# EAGLE board smartwatch (1)9 (EAGLE 6.3)

Size 100 x 80 mm. Coordinates in mm from the lower left corner, seen from the top.
Outline: 0,0 100,0 100,80 0,80 0,0
Copper layers (1*16): Top 0.035mm / dielectric 1.5mm / Bottom 0.035mm
Design rules "default": minimum track width 10mil, minimum drill 24mil, track to track 8mil, track to pad 8mil, pad to pad 8mil, via to via 8mil, smd to smd 8mil, copper to edge 40mil, drill to drill 8mil, minimum pad ring 10mil, minimum via ring 8mil, stop-mask expansion 4mil, vias tented up to drill 0mil, thermal gap 10mil

## Footprints (pad centres in the part's own frame; a part is rotated, then mirrored left to right if it is on the bottom)
C0805 = smd 1.3 x 1.5: 1 -0.95,0; 2 0.95,0
1X02 = drill 1.016 long: 1 -1.27,0; 2 1.27,0
USB-B-MICRO-SMD_V03 = smd 1.4 x 0.4: D+1 2.7,0; D-1 2.7,0.65; GND1 2.7,-1.3; ID1 2.7,-0.65; VBUS1 2.7,1.3 | hole 0.85: 2.2,1.9; 2.2,-1.9
2X03 = drill 1.016 octagon: 1 -2.54,-1.27; 2 -2.54,1.27; 3 0,-1.27; 4 0,1.27; 5 2.54,-1.27; 6 2.54,1.27
R2012 = smd 1.3 x 1.5: 1 -0.85,0; 2 0.85,0
TQFP32 = smd 1.27 x 0.559: 1 -4.293,2.8; 2 -4.293,2; 3 -4.293,1.2; 4 -4.293,0.4; 5 -4.293,-0.4; 6 -4.293,-1.2; 7 -4.293,-2; 8 -4.293,-2.8; 17 4.293,-2.8; 18 4.293,-2; 19 4.293,-1.2; 20 4.293,-0.4; 21 4.293,0.4; 22 4.293,1.2; 23 4.293,2; 24 4.293,2.8 | smd 0.559 x 1.27: 9 -2.8,-4.293; 10 -2,-4.293; 11 -1.2,-4.293; 12 -0.4,-4.293; 13 0.4,-4.293; 14 1.2,-4.293; 15 2,-4.293; 16 2.8,-4.293; 25 2.8,4.293; 26 2,4.293; 27 1.2,4.293; 28 0.4,4.293; 29 -0.4,4.293; 30 -1.2,4.293; 31 -2,4.293; 32 -2.8,4.293
HM-11 = smd 2.4 x 0.9: GND 6.5,0; NC@5 -7,0; NC@6 -7,-1.5; NC@7 -7,-3; NC@8 -7,-4.5; NC@10 6.5,-3; PIO0 6.5,6; PIO1 6.5,4.5; PIO2 6.5,3; PIO3 6.5,1.5; RESETB 6.5,-1.5; UART_CTS -7,3; UART_RTS -7,6; UART_RX -7,1.5; UART_TX -7,4.5; VCC 6.5,-4.5
UG-2864HSWEG01_0.96IN_WRAPAROUND = smd 0.35 x 2.2 bottom: 1 -10.15,-1.2; 2 -9.45,-1.2; 3 -8.75,-1.2; 4 -8.05,-1.2; 5 -7.35,-1.2; 6 -6.65,-1.2; 7 -5.95,-1.2; 8 -5.25,-1.2; 9 -4.55,-1.2; 10 -3.85,-1.2; 11 -3.15,-1.2; 12 -2.45,-1.2; 13 -1.75,-1.2; 14 -1.05,-1.2; 15 -0.35,-1.2; 16 0.35,-1.2; 17 1.05,-1.2; 18 1.75,-1.2; 19 2.45,-1.2; 20 3.15,-1.2; 21 3.85,-1.2; 22 4.55,-1.2; 23 5.25,-1.2; 24 5.95,-1.2; 25 6.65,-1.2; 26 7.35,-1.2; 27 8.05,-1.2; 28 8.75,-1.2; 29 9.45,-1.2; 30 10.15,-1.2 | hole 0.4: -8,-5.45; 8,-5.45
SOT95P275X110-5N = smd 1.321 x 0.457: 1 -1.27,0.94; 2 -1.27,0; 3 -1.27,-0.94; 4 1.27,-0.94; 5 1.27,0.94
SOT23-5 = smd 0.55 x 1.2: 1 -0.95,-1.3; 2 0,-1.3; 3 0.95,-1.3; 4 0.95,1.3; 5 -0.95,1.3

## Placement (x,y rotation side)
C1  1uF  [C0805]  -52.07,46.99 0 top  (outside the outline)
C2  1uF  [C0805]  -15.24,58.42 0 top  (outside the outline)
C3  4.7uF  [C0805]  -40.64,46.99 0 top  (outside the outline)
C4  4.7uF  [C0805]  -46.99,46.99 0 top  (outside the outline)
JP1  [1X02]  -20.32,57.15 0 top  (outside the outline)
JP2  MICRO USB  [USB-B-MICRO-SMD_V03]  -34.29,29.21 0 top  (outside the outline)
JP3  PDI  [2X03]  -58.42,-3.81 0 top  (outside the outline)
R1  10K  [R2012]  -30.48,55.88 0 top  (outside the outline)
U1  E5-TQFP  [TQFP32]  -45.72,30.48 0 top  (outside the outline)
U2  HM-11  [HM-11]  -21.59,30.48 0 top  (outside the outline)
U3  [UG-2864HSWEG01_0.96IN_WRAPAROUND]  -26.67,7.62 0 top  (outside the outline)
U4  LD6806TD/33P  [SOT95P275X110-5N]  -29.21,49.53 0 top  (outside the outline)
U5  MCP73831  [SOT23-5]  -26.67,57.15 0 top  (outside the outline)

## Library data of the parts
C1-C4 = rcl
JP1 JP3 = pinhead
JP2 = SparkFun-Connectors; PROD_ID: CONN-11752
R1 = resistor
U1 = e5
U2 = hm-11
U3 = microbuilder
U4 = nxp-ld6806td_33p; MPN: LD6806TD/33P; OC_FARNELL: 2095510; OC_NEWARK: 93T1671; PACKAGE: TSOP-5; SUPPLIER: NXP
U5 = SparkFun

## Nets
GND: C1.2 C2.2 C3.2 C4.2 JP1.2 JP2.GND1 JP3.6 R1.2 U5.2
PDI_CLK: JP3.5 U1.8
PDI_DATA: JP3.1 U1.7
VBAT: C1.1 C4.1 JP1.1 R1.1 U4.1 U4.3 U5.3
VCC: C2.1 JP3.2 U3.28 U4.5
VDD: U3.9
VLSS: U3.29
VSS: U3.8
VUSB: C3.1 JP2.VBUS1 U5.4

## Tracks (layer width: path | path; a pad name or v marks a point on that pad's centre or on a via)
GND  (8 unrouted)
PDI_CLK  (1 unrouted)
PDI_DATA  (1 unrouted)
VBAT  (6 unrouted)
VCC  (3 unrouted)
VUSB  (2 unrouted)